# EAGLE board ECA0410_PCB_Hartley_Oscillator (EAGLE 9.6.2)
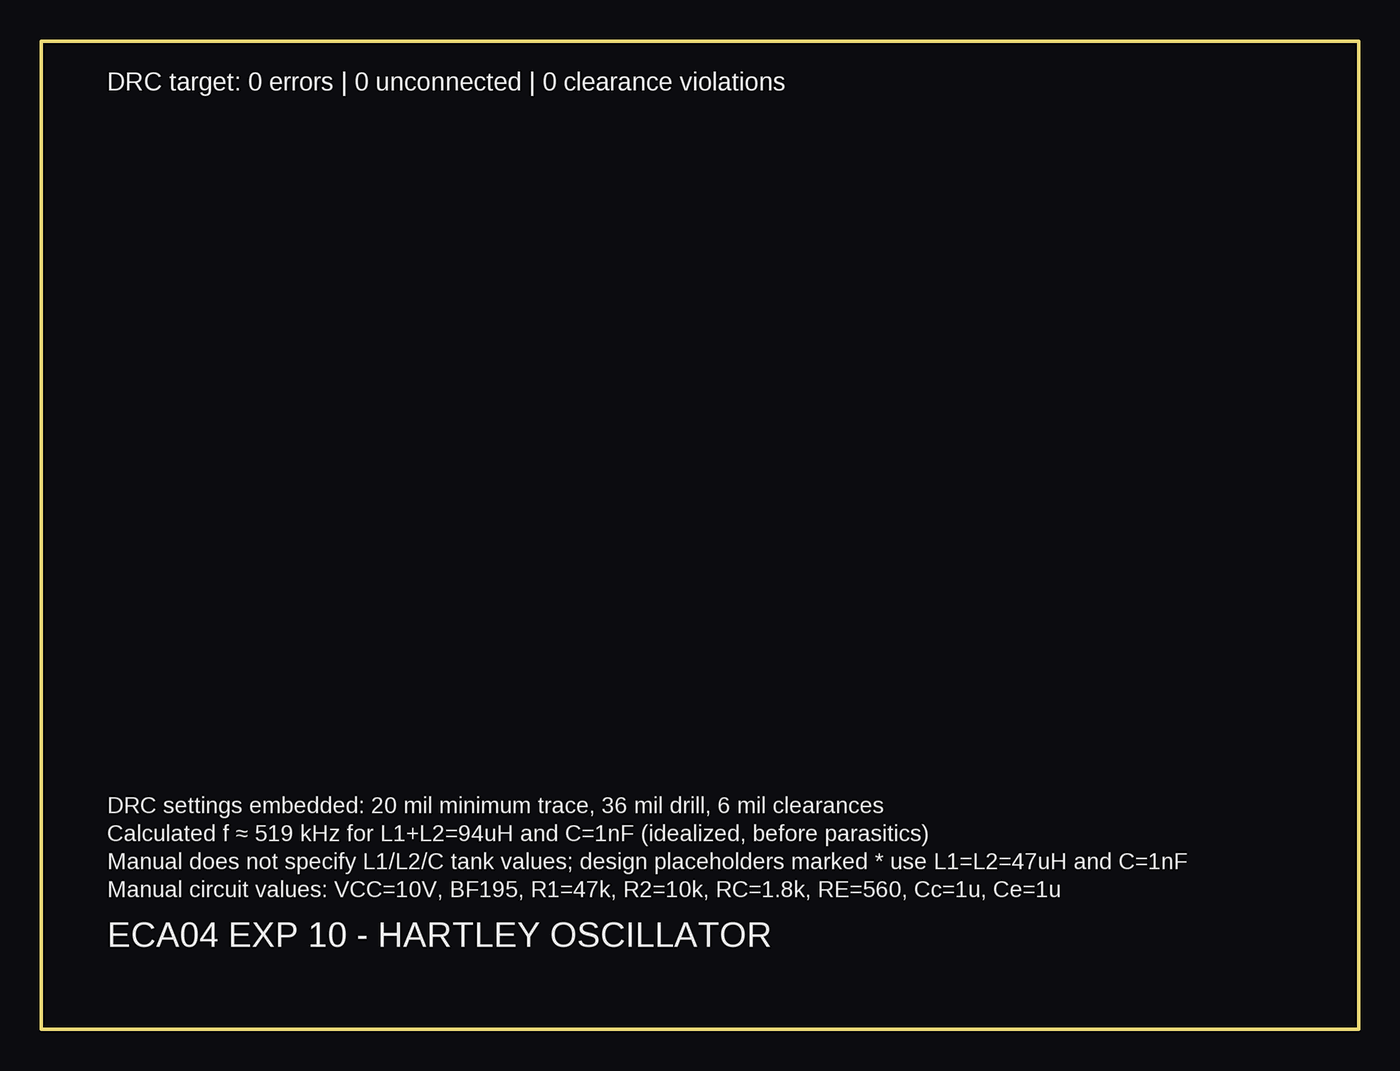
[diagram p0: board, top side]
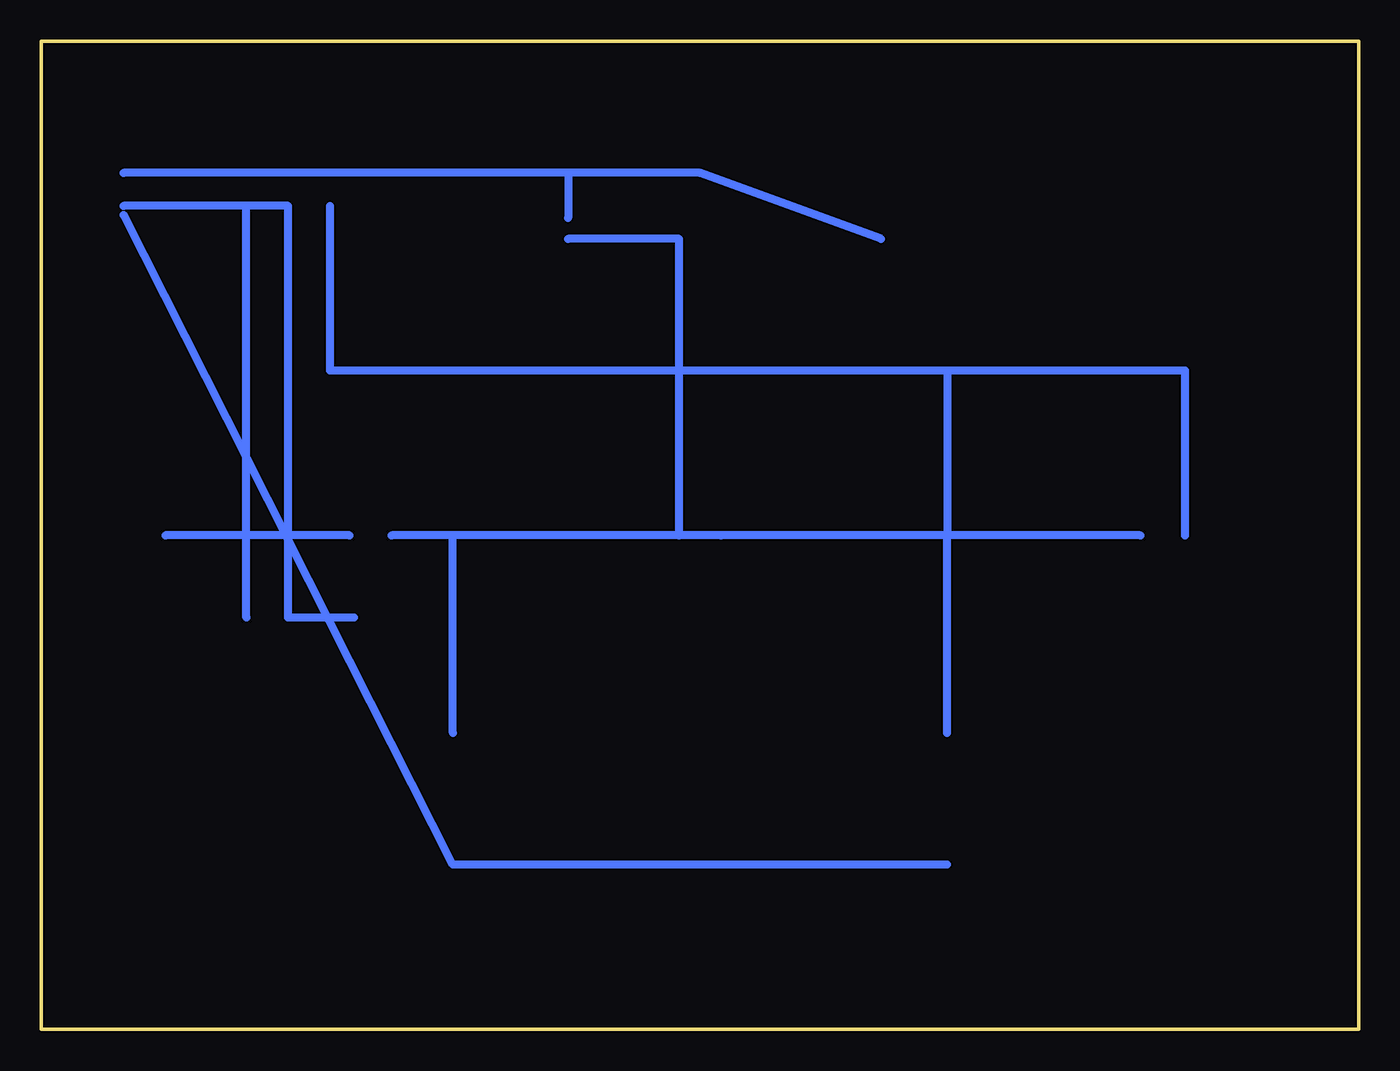
[diagram p1: board, bottom side, seen from below]

Size 80 x 60 mm. Coordinates in mm from the lower left corner, seen from the top.
Outline: 0,0 80,0 80,60 0,60 0,0
Copper layers (1*16): Top / Bottom
Design rules: minimum track width 20mil, minimum drill 36mil, track to track 6mil, track to pad 6mil, pad to pad 6mil, via to via 6mil

## Placement (x,y rotation side)
CE  1u  [C_THT]  48,48 0 top
CIN  1u  [C_THT]  12,30 90 top
COUT  1u  [C_THT]  60,30 90 top
CT  1nF*  [C_THT]  65,42 0 top
J1  INPUT  [HDR2]  5,30 0 top
J2  OUTPUT  [HDR2]  75,30 0 top
J3  VCC/GND  [HDR2]  75,52 0 top
L1  47uH*  [L_THT]  65,25 0 top
L2  47uH*  [L_THT]  65,50 0 top
Q1  BF195  [TO92]  40,30 0 top
R1  47k  [R_THT]  25,14 90 top
R2  10k  [R_THT]  25,48 90 top
RC  1.8k  [R_THT]  55,14 90 top
RE  560  [R_THT]  40,48 0 top

## Library data of the parts
CE CIN COUT CT J1-J3 L1 L2 Q1 R1 R2 RC RE = Custom

## Nets
BASE: CIN.2 Q1.2 R1.2 R2.1
COL: COUT.1 CT.1 L1.1 Q1.1 RC.2
CTAP: L1.2 L2.2
EMITTER: CE.1 Q1.3 RE.1
FB: CIN.1 CT.2 L2.1
GND: CE.2 J3.2 L1.2 R2.2 RE.2
OUT: COUT.2 J2.1
VCC: J3.1 R1.1 RC.1

## Tracks (layer width: path | path; a pad name or v marks a point on that pad's centre or on a via)
BASE
  Bottom 0.5: 25,18 25,30 | 25,30 38.73,30 | 25,40 25,30 | 13.27,30 25,30
COL
  Bottom 0.5: 38.73,30 55,30 | 55,18 55,30 | 55,30 58.73,30 | 61,25 65,25 65,40
CTAP
  Bottom 0.5: 67.54,25 67.54,50
EMITTER
  Bottom 0.5: 41.27,30 41.27,48 48,48
FB
  Bottom 0.5: 10.54,30 10.54,40 62.46,40 62.46,50 | 62.46,50
GND
  Bottom 0.5: 29,48 40,52 75,52 | 48,52 48,49.27 | 65,25 65,50 75,50
OUT
  Bottom 0.5: 61.27,30 72.46,30
VCC
  Bottom 0.5: 25,10 55,10 75,49.46

## Text on the board
tPlace: DRC target: 0 errors | 0 unconnected | 0 clearance violations | DRC settings embedded: 20 mil minimum trace, 36 mil drill, 6 mil clearances | Calculated f ≈ 519 kHz for L1+L2=94uH and C=1nF (idealized, before parasitics) | Manual does not specify L1/L2/C tank values; design placeholders marked * use L1=L2=47uH and C=1nF | Manual circuit values: VCC=10V, BF195, R1=47k, R2=10k, RC=1.8k, RE=560, Cc=1u, Ce=1u | ECA04 EXP 10 - HARTLEY OSCILLATOR